# EAGLE board HASP_relay (EAGLE 8.7.0)
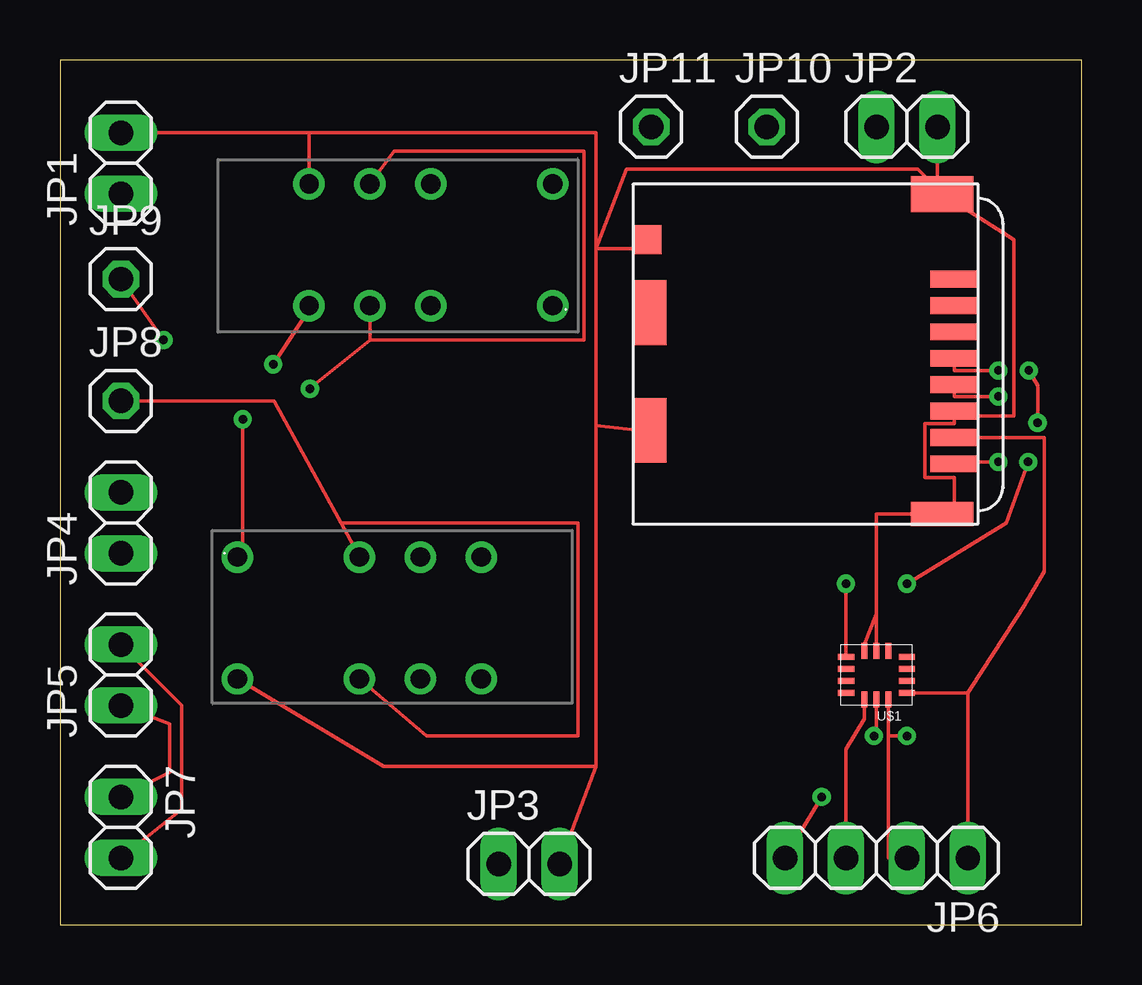
[diagram p0: board, top side]
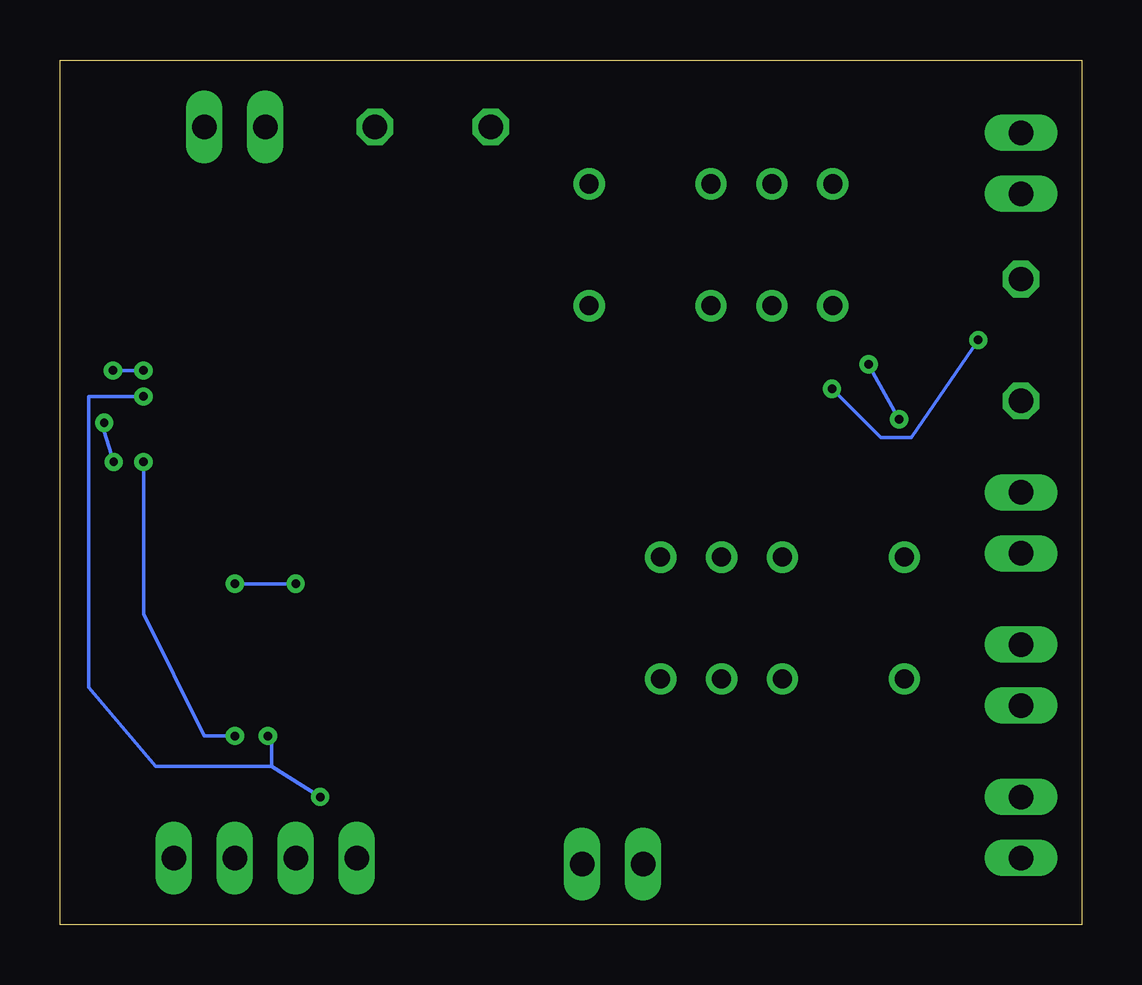
[diagram p1: board, bottom side, seen from below]

Size 42.6 x 36.06 mm. Coordinates in mm from the lower left corner, seen from the top.
Outline: 0,0 42.6,0 42.6,36.06 0,36.06 0,0
Copper layers (1*16): Top 0.035mm / dielectric 1.5mm / Bottom 0.035mm
Design rules "default": minimum track width 6mil, minimum drill 0.35mm, track to track 6mil, track to pad 6mil, pad to pad 6mil, via to via 6mil, smd to smd 6mil, copper to edge 40mil, drill to drill 6mil, minimum pad ring 10mil, minimum via ring 8mil, stop-mask expansion 4mil, vias tented up to drill 0mil, thermal gap 10mil

## Footprints (pad centres in the part's own frame; a part is rotated, then mirrored left to right if it is on the bottom)
1X02 = drill 1.016 long: 1 -1.27,0; 2 1.27,0
1X04 = drill 1.016 long: 1 -3.81,0; 2 -1.27,0; 3 1.27,0; 4 3.81,0
1X01 = drill 1.016 octagon: 1 0,0
IMU = smd 0.675 x 0.25: 1 -1.262,0.75; 2 -1.262,0.25; 3 -1.262,-0.25; 4 -1.262,-0.75; 8 1.262,-0.75; 9 1.262,-0.25; 10 1.262,0.25; 11 1.262,0.75 | smd 0.25 x 0.675: 5 -0.5,-1.012; 6 0,-1.012; 7 0.5,-1.012; 12 0.5,1.012; 13 0,1.012; 14 -0.5,1.012
EC2-5SNU = drill 0.8: 1 1.05,6.19; 3 6.13,6.19; 4 8.67,6.19; 5 11.21,6.19; 8 11.21,1.11; 9 8.67,1.11; 10 6.13,1.11; 12 1.05,1.11
MICRO_SD_HINGED = smd 0.7 x 2: CD -1.1,-13.4; CLK -4.4,-13.4; CMD -2.2,-13.4; DAT0 -6.6,-13.4; DAT1 -7.7,-13.4; DAT2 0,-13.4; VDD -3.3,-13.4; VSS -5.5,-13.4 | smd 2.7 x 1.4: CD1 -1.4,-0.7; GND3 -6.3,-0.7 | smd 1.5 x 2.6: GND1 3.55,-12.9 | smd 1.2 x 1.2: GND2 1.65,-0.6 | smd 1 x 2.6: GND4 -9.8,-12.9

## Placement (x,y rotation side)
JP1  [1X02]  2.54,31.75 90 top
JP2  [1X02]  35.31,33.27 0 top
JP3  [1X02]  19.56,2.54 0 top
JP4  [1X02]  2.54,16.76 90 top
JP5  [1X02]  2.54,10.41 90 top
JP6  [1X04]  34.04,2.79 180 top
JP7  [1X02]  2.54,4.06 270 top
JP8  [1X01]  2.54,21.84 0 top
JP9  [1X01]  2.54,26.92 0 top
JP10  [1X01]  29.46,33.27 0 top
JP11  [1X01]  24.64,33.27 0 top
U$1  [IMU]  34.04,10.41 180 top
U$2  [EC2-5SNU]  6.35,9.14 0 top
U$3  [EC2-5SNU]  21.59,32 180 top
U$4  MICRO_SD  [MICRO_SD_HINGED]  23.88,26.92 90 top

## Library data of the parts
JP1-JP11 = pinhead
U$1 = IMU
U$2 U$3 = relay board
U$4 = NR_connectors

## Nets
+3V3: U$1.8 U$4.VDD
+5V: JP3.1
+10V: JP2.1
+30V: JP1.1
CS: JP6.3 U$1.12
DIS1: JP4.1
DIS2: JP4.2
GND: JP1.2 JP2.2 JP3.2 U$1.6 U$1.7 U$2.12 U$3.8 U$4.GND1 U$4.GND2 U$4.GND3 U$4.GND4 U$4.VSS
INT1: JP8.1 U$2.3 U$2.10
INT2: JP9.1 U$3.4 U$3.9
MISO: JP6.1 U$1.1 U$4.DAT0
MOSI: JP6.2 U$1.14 U$4.DAT1
PWR: U$2.1 U$3.5
RX: JP5.2 JP7.2
SCK: JP6.4 U$1.13 U$4.CLK
SIGNAL_1: JP10.1
SIGNAL_2: JP11.1
TX: JP5.1 JP7.1
VDDIO: U$1.5

## Tracks (layer width: path | path; a pad name or v marks a point on that pad's centre or on a via)
+3V3  (via drill 0.35)
  Top 0.152: U$1.8 v32.77,14.22 | v35.31,14.22 39.45,16.76 v40.36,19.3 | v39.12,23.11 37.28,23.11 U$4.VDD | v40.39,23.11 40.75,22.48 v40.75,20.93
  Bottom 0.152: v32.77,14.22 v35.31,14.22 | v40.39,23.11 v39.12,23.11 | v40.75,20.93 40.75,20.57 v40.36,19.3
CS
  Top 0.152: JP6.3 32.77,7.31 33.54,8.58 U$1.12
GND
  Top 0.152: JP1.2 10.38,33.02 | U$3.8 10.38,33.02 | 10.38,33.02 22.35,33.02 22.35,28.19 | U$2.12 13.5,6.6 22.35,6.6 | JP2.2 36.58,30.47 U$4.GND1 | U$4.GND1 35.76,31.5 23.62,31.5 22.35,28.19 | U$4.GND2 24.48,28.19 22.35,28.19 | U$4.GND3 24.58,20.57 22.35,20.83 | 22.35,20.83 22.35,28.19 | U$4.GND1 39.75,28.57 39.75,21.21 37.28,21.21 | JP3.2 22.35,6.6 | 22.35,6.6 22.35,20.83 | U$1.6 34.04,12.95 | 34.04,12.95 34.04,17.12 U$4.GND4 37.28,17.12 37.28,18.64 36.05,18.64 36.05,20.9 37.28,20.9 37.28,21.21 | U$4.VSS 37.28,21.21 | U$1.7 33.54,11.68 34.04,12.95
INT1
  Top 0.152: JP8.1 8.92,21.84 11.72,16.76 | U$2.3 11.72,16.76 | U$2.10 15.27,7.87 21.59,7.87 21.59,16.76 11.72,16.76
INT2  (via drill 0.35)
  Top 0.152: JP9.1 v4.32,24.38 | 12.92,24.38 U$3.4 | v10.41,22.35 12.92,24.38 | U$3.9 13.94,32.26 21.84,32.26 21.84,24.38 12.92,24.38
  Bottom 0.152: v4.32,24.38 7.11,20.32 8.38,20.32 v10.41,22.35
MISO
  Top 0.152: 37.85,9.66 U$1.1 | JP6.1 37.85,9.66 | 37.85,9.66 40.13,13.22 41.02,14.73 41.02,20.32 U$4.DAT0
MOSI  (via drill 0.35)
  Top 0.152: JP6.2 34.54,2.79 U$1.14 34.54,7.87 v35.31,7.87 | v39.12,19.3 37.28,19.3 U$4.DAT1
  Bottom 0.152: v39.12,19.3 39.12,12.95 36.58,7.87 v35.31,7.87
PWR  (via drill 0.35)
  Top 0.152: U$2.1 7.62,15.33 v7.62,21.08 | U$3.5 10.38,25.65 v8.89,23.37
  Bottom 0.152: v7.62,21.08 v8.89,23.37
RX
  Top 0.152: JP5.2 5.08,9.14 5.08,4.83 JP7.2
SCK  (via drill 0.35)
  Top 0.152: JP6.4 v31.75,5.33 | v39.12,22.03 37.28,22.03 U$4.CLK | v33.93,7.87 34.04,7.87 U$1.13
  Bottom 0.152: v31.75,5.33 33.78,6.6 | 33.78,6.6 38.61,6.6 41.4,9.91 41.4,22.03 v39.12,22.03 | v33.93,7.87 33.78,7.87 33.78,6.6
TX
  Top 0.152: JP5.1 4.57,8.38 4.57,6.35 JP7.1